# EAGLE board robo (EAGLE 8.0.1)
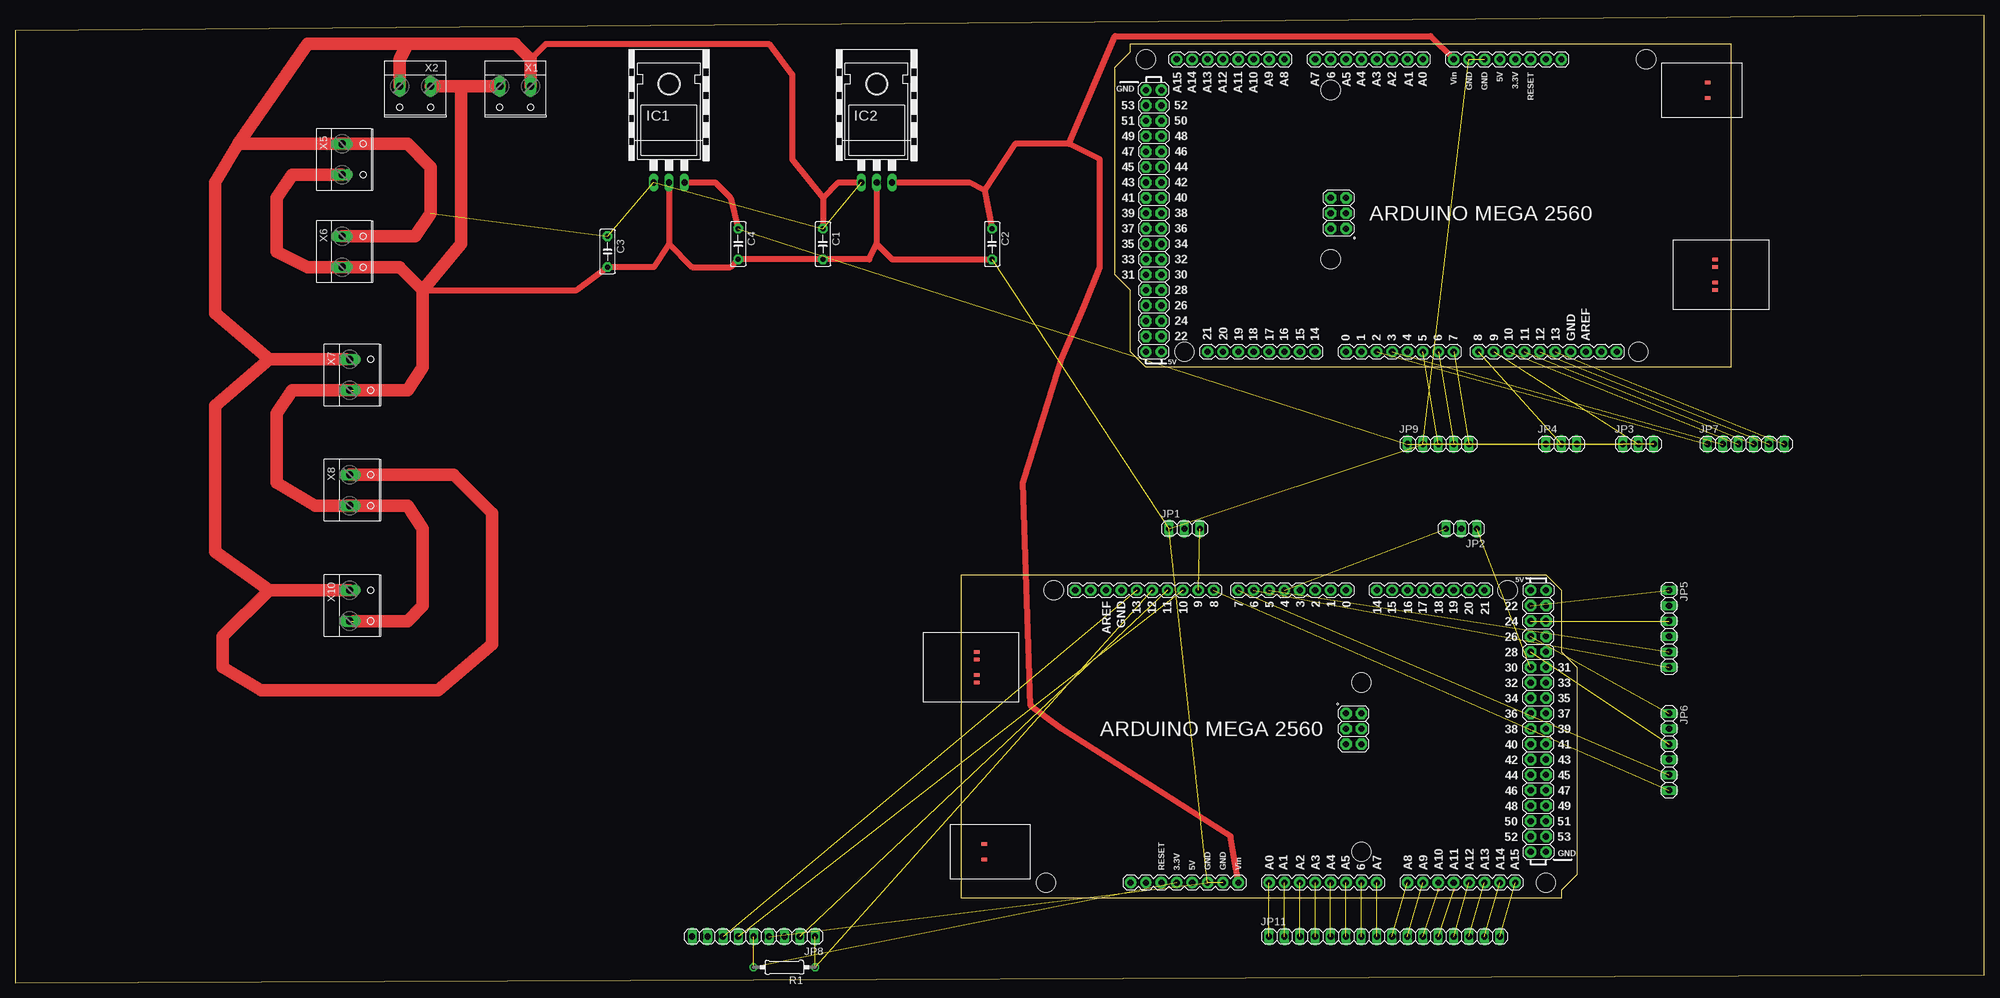
[diagram p0: board, top side]

Size 325.1 x 159.69 mm. Coordinates in mm from the lower left corner, seen from the top.
Outline: 0,0 325.1,1.27 325.1,159.69 0,157.15 0,0
Copper layers (1*16): Top 0.035mm / dielectric 1.5mm / Bottom 0.035mm
Design rules "default": minimum track width 10mil, minimum drill 24mil, track to track 8mil, track to pad 8mil, pad to pad 8mil, via to via 8mil, smd to smd 8mil, copper to edge 40mil, drill to drill 8mil, minimum pad ring 10mil, minimum via ring 8mil, stop-mask expansion 4mil, vias tented up to drill 0mil, thermal gap 10mil
Holes 2.8 mm at 2.03,-42.42 28.45,-42.42 28.45,-7.11 2.03,-7.11

## Footprints (pad centres in the part's own frame; a part is rotated, then mirrored left to right if it is on the bottom)
C5B2.5 = drill 0.813 pad 1.6 octagon: 1 -2.54,0; 2 2.54,0
78XXH = drill 1.016 long: GND 0,-5.08; IN -2.54,-5.08; OUT 2.54,-5.08 | hole 3.302: 0,11.176
1X03 = drill 1.016 long: 1 -2.54,0; 2 0,0; 3 2.54,0
1X06 = drill 1.016 long: 1 -6.35,0; 2 -3.81,0; 3 -1.27,0; 4 1.27,0; 5 3.81,0; 6 6.35,0
1X09 = drill 1.016 long: 1 -10.16,0; 2 -7.62,0; 3 -5.08,0; 4 -2.54,0; 5 0,0; 6 2.54,0; 7 5.08,0; 8 7.62,0; 9 10.16,0
1X05 = drill 1.016 long: 1 -5.08,0; 2 -2.54,0; 3 0,0; 4 2.54,0; 5 5.08,0
1X16 = drill 1.016 long: 1 -19.05,0; 2 -16.51,0; 3 -13.97,0; 4 -11.43,0; 5 -8.89,0; 6 -6.35,0; 7 -3.81,0; 8 -1.27,0; 9 1.27,0; 10 3.81,0; 11 6.35,0; 12 8.89,0; 13 11.43,0; 14 13.97,0; 15 16.51,0; 16 19.05,0
ARDUINO_MEGA2560 = drill 1.016 pad 1.88: 0 63.5,50.8; 1 60.96,50.8; 2 58.42,50.8; 3 55.88,50.8; 3.3V 35.56,2.54; 4 53.34,50.8; 5 50.8,50.8; 5V 38.1,2.54; 5V. 93.98,50.8; 5V.. 96.52,50.8; 6 48.26,50.8; 7 45.72,50.8; 8 41.656,50.8; 9 39.116,50.8; 10 36.576,50.8; 11 34.036,50.8; 12 31.496,50.8; 13 28.956,50.8; 14 68.58,50.8; 15 71.12,50.8; 16 73.66,50.8; 17 76.2,50.8; 18 78.74,50.8; 19 81.28,50.8; 20 83.82,50.8; 21 86.36,50.8; A0 50.8,2.54; A1 53.34,2.54; A2 55.88,2.54; A3 58.42,2.54; A4 60.96,2.54; A5 63.5,2.54; A6 66.04,2.54; A7 68.58,2.54; A8 73.66,2.54; A9 76.2,2.54; A10 78.74,2.54; A11 81.28,2.54; A12 83.82,2.54; A13 86.36,2.54; A14 88.9,2.54; A15 91.44,2.54; AREF 23.876,50.8; GND 26.416,50.8; GND. 43.18,2.54; GND.. 40.64,2.54; GND... 93.98,7.62; GND.... 96.52,7.62; I/OREF 30.48,2.54; N/C 27.94,2.54; RESET 33.02,2.54; SCL1 18.796,50.8; SDA1 21.336,50.8; VIN 45.72,2.54 | drill 1.016 pad 1.88 octagon: 22 93.98,48.26; 23 96.52,48.26; 24 93.98,45.72; 25 96.52,45.72; 26 93.98,43.18; 27 96.52,43.18; 28 93.98,40.64; 29 96.52,40.64; 30 93.98,38.1; 31 96.52,38.1; 32 93.98,35.56; 33 96.52,35.56; 34 93.98,33.02; 35 96.52,33.02; 36 93.98,30.48; 37 96.52,30.48; 38 93.98,27.94; 39 96.52,27.94; 40 93.98,25.4; 41 96.52,25.4; 42 93.98,22.86; 43 96.52,22.86; 44 93.98,20.32; 45 96.52,20.32; 46 93.98,17.78; 47 96.52,17.78; 48 93.98,15.24; 49 96.52,15.24; 50 93.98,12.7; 51 96.52,12.7; 52 93.98,10.16; 53 96.52,10.16; +5V_ 66.04,30.48; GND__ 66.04,25.4; MISO 63.5,30.48; MOSI 66.04,27.94; RESET. 63.5,25.4; SCK 63.5,27.94 | smd 1.016 x 0.508: <PWR>+V 3.81,8.89; <PWR>-V 3.81,6.35; <USB>+V 2.54,40.64; <USB>D+ 2.54,39.37; <USB>D- 2.54,36.83; <USB>GND 2.54,35.56 | hole 3.2: 15.24,50.8; 13.97,2.54; 66.04,35.56; 66.04,7.62; 90.17,50.8; 96.52,2.54
0207/10 = drill 0.813 octagon: 1 -5.08,0; 2 5.08,0
W237-132 = drill 1.194 long: 1 -2.54,-0.635; 2 2.54,-0.635

## Placement (x,y rotation side)
C1  [C5B2.5]  133.35,121.92 270 top
C2  [C5B2.5]  161.29,121.92 270 top
C3  [C5B2.5]  97.79,120.65 270 top
C4  [C5B2.5]  119.38,121.92 270 top
IC1  [78XXH]  107.95,137.16 0 top
IC2  [78XXH]  142.24,137.16 0 top
JP1  [1X03]  193.04,74.93 0 top
JP2  [1X03]  238.76,74.93 180 top
JP3  [1X03]  267.97,88.9 0 top
JP4  [1X03]  255.27,88.9 0 top
JP5  [1X06]  273.05,58.42 270 top
JP6  [1X06]  273.05,38.1 270 top
JP7  [1X06]  285.75,88.9 0 top
JP8  [1X09]  121.92,7.62 180 top
JP9  [1X05]  234.95,88.9 0 top
JP11  [1X16]  226.06,7.62 0 top
MEGA1  [ARDUINO_MEGA2560]  156.21,13.97 0 top
MEGA2  [ARDUINO_MEGA2560]  283.21,154.94 180 top
R1  [0207/10]  127,2.54 180 top
X1  [W237-132]  82.55,147.32 180 top
X2  [W237-132]  66.04,147.32 180 top
X5  [W237-132]  54.61,135.89 270 top
X6  [W237-132]  54.61,120.65 270 top
X7  [W237-132]  55.88,100.33 270 top
X8  [W237-132]  55.88,81.28 270 top
X10  [W237-132]  55.88,62.23 270 top

## Library data of the parts
C1-C4 = capacitor-wima; OC_FARNELL: unknown
IC1 IC2 = 78xx_with_heatsink; OC_FARNELL: unknown
JP1-JP9 JP11 = pinhead
MEGA1 MEGA2 = E14_Arduino_revC; OC_FARNELL: unknown
R1 = resistor; OC_FARNELL: unknown
X1 X2 X5-X8 X10 = con-wago-508; OC_FARNELL: unknown; OC_NEWARK: unknown

## Nets
3.3V: JP8.5 MEGA1.3.3V R1.2
5V: C4.1 IC1.OUT JP3.1 JP4.1 JP9.1
9V: C2.1 IC2.OUT MEGA1.VIN MEGA2.VIN
+12V: X1.1 X2.2
+12V1: C1.1 C3.1 IC1.IN IC2.IN X5.1 X6.1 X8.1 X10.1
A0: JP11.1 MEGA1.A0
A1: JP11.2 MEGA1.A1
A2: JP11.3 MEGA1.A2
A3: JP11.4 MEGA1.A3
A4: JP11.5 MEGA1.A4
A5: JP11.6 MEGA1.A5
A6: JP11.7 MEGA1.A6
A7: JP11.8 MEGA1.A7
A8: JP11.9 MEGA1.A8
A9: JP11.10 MEGA1.A9
A10: JP11.11 MEGA1.A10
A11: JP11.12 MEGA1.A11
A12: JP11.13 MEGA1.A12
A13: JP11.14 MEGA1.A13
A14: JP11.15 MEGA1.A14
A15: JP11.16 MEGA1.A15
GND: C1.2 C2.2 C3.2 C4.2 IC1.GND IC2.GND JP1.1 JP3.3 JP4.3 JP8.4 JP9.2 MEGA1.GND. MEGA1.GND.. MEGA2.GND. MEGA2.GND.. X1.2 X2.1 X5.2 X6.2 X7.2 X8.2 X10.2
N$26: JP1.2
N$34: JP8.3
N$39: JP8.8
N$40: JP8.9
PIN2: JP7.1 MEGA2.2
PIN3: JP7.2 MEGA2.3
PIN4: MEGA2.4
PIN5: JP9.3 MEGA2.5
PIN6: JP9.4 MEGA2.6
PIN7: JP9.5 MEGA2.7
PIN8: JP4.2 MEGA2.8
PIN9: JP3.2 MEGA2.9
PIN10: JP7.3 MEGA2.10
PIN11: JP7.4 MEGA2.11
PIN12: JP7.5 MEGA2.12
PIN13: JP7.6 MEGA2.13
PIN_4: JP2.3 MEGA1.4
PIN_5: JP5.5 MEGA1.5
PIN_6: JP5.6 MEGA1.6
PIN_7: JP6.5 MEGA1.7
PIN_8: JP6.6 MEGA1.8
PIN_9: JP1.3 MEGA1.9
PIN_10: JP8.6 MEGA1.10
PIN_11: JP8.2 MEGA1.11
PIN_12: JP8.1 MEGA1.12 R1.1
PIN_13: JP8.7 MEGA1.13
PIN_22: JP5.1 MEGA1.22
PIN_23: JP5.2
PIN_24: JP5.3 MEGA1.24
PIN_25: JP5.4
PIN_26: JP6.1 MEGA1.26
PIN_27: JP6.2
PIN_28: JP6.3 MEGA1.28
PIN_29: JP6.4
PIN_30: JP2.1 MEGA1.30
PIN_31: JP2.2

## Tracks (layer width: path | path; a pad name or v marks a point on that pad's centre or on a via)
3.3V  (2 unrouted)
5V  (3 unrouted)
  Top 1.016: IC1.OUT 115.57,132.08 118.11,129.54 C4.1
9V
  Top 1.016: IC2.OUT 157.48,132.08 160.02,130.81 | 160.02,130.81 C2.1 | MEGA1.VIN 200.66,24.13 172.72,41.91 167.64,45.72 166.37,82.55 172.72,102.87 176.53,111.76 179.07,118.11 179.07,135.89 173.99,138.43 | 173.99,138.43 165.1,138.43 160.02,130.81 | 173.99,138.43 181.61,156.21 233.68,156.21 MEGA2.VIN
+12V
  Top 1.016: 85.09,152.4 87.63,154.94 124.46,154.94 128.27,149.86 128.27,135.89 133.35,129.54 | 133.35,129.54 133.35,124.46 | 133.35,129.54 135.89,132.08 139.7,132.08
  Top 2.032: X2.2 63.5,152.4 64.77,154.94 | 64.77,154.94 82.55,154.94 85.09,152.4 X1.1 | 64.77,154.94 48.26,154.94 36.83,138.43
+12V1  (4 unrouted)
  Top 2.032: X6.1 66.04,123.19 68.58,127 68.58,134.62 64.77,138.43 X5.1 36.83,138.43 33.02,132.08 33.02,110.49 41.91,102.87 | 41.91,102.87 54.61,102.87 | 41.91,102.87 33.02,95.25 33.02,71.12 41.91,64.77 | 41.91,64.77 X10.1 | X8.1 72.39,83.82 78.74,77.47 78.74,55.88 69.85,48.26 40.64,48.26 34.29,52.07 34.29,57.15 41.91,64.77
A0  (1 unrouted)
A1  (1 unrouted)
A2  (1 unrouted)
A3  (1 unrouted)
A4  (1 unrouted)
A5  (1 unrouted)
A6  (1 unrouted)
A7  (1 unrouted)
A8  (1 unrouted)
A9  (1 unrouted)
A10  (1 unrouted)
  Top 0.406: 234.95,15.24 MEGA1.A10
A11  (1 unrouted)
  Top 0.406: 237.49,15.24 MEGA1.A11
A12  (1 unrouted)
A13  (1 unrouted)
A14  (1 unrouted)
A15  (1 unrouted)
GND  (11 unrouted)
  Top 1.016: 67.31,114.3 92.71,114.3 C3.2 105.41,118.11 107.95,121.92 | IC1.GND 107.95,121.92 | 107.95,121.92 111.76,118.11 118.11,118.11 C4.2 C1.2 140.97,119.38 142.24,121.92 | IC2.GND 142.24,121.92 | 142.24,121.92 144.78,119.38 C2.2
  Top 2.032: X2.1 73.66,147.96 | 73.66,147.96 X1.2 | X5.2 45.72,133.35 43.18,129.54 43.18,120.65 48.26,118.11 X6.2 63.5,118.11 67.31,114.3 | 67.31,114.3 67.31,101.6 64.77,97.79 55.88,97.79 | X7.2 45.72,97.79 43.18,93.98 43.18,82.55 49.53,78.74 X8.2 64.77,78.74 67.31,74.93 67.31,62.23 64.77,59.69 55.88,59.69 | 73.66,147.96 73.66,121.92 67.31,114.3
PIN2  (1 unrouted)
PIN3  (1 unrouted)
PIN5  (1 unrouted)
PIN6  (1 unrouted)
PIN7  (1 unrouted)
PIN8  (1 unrouted)
PIN9  (1 unrouted)
PIN10  (1 unrouted)
PIN11  (1 unrouted)
PIN12  (1 unrouted)
PIN13  (1 unrouted)
PIN_4  (1 unrouted)
PIN_5  (1 unrouted)
PIN_6  (1 unrouted)
PIN_7  (1 unrouted)
PIN_8  (1 unrouted)
PIN_9  (1 unrouted)
PIN_10  (1 unrouted)
PIN_11  (1 unrouted)
PIN_12  (2 unrouted)
PIN_13  (1 unrouted)
PIN_22  (1 unrouted)
PIN_24  (1 unrouted)
PIN_26  (1 unrouted)
PIN_28  (1 unrouted)
PIN_30  (1 unrouted)